# Altium PCB Payload_ESP.PcbDoc
Units mm, origin at the board's own origin, x right, y up, seen from the top; angles counter-clockwise.
Board outline 91.43 x 100 mm, 2 copper layers (Top Layer, Bottom Layer); 17 components, 43 nets, 123 pads, 0 vias.
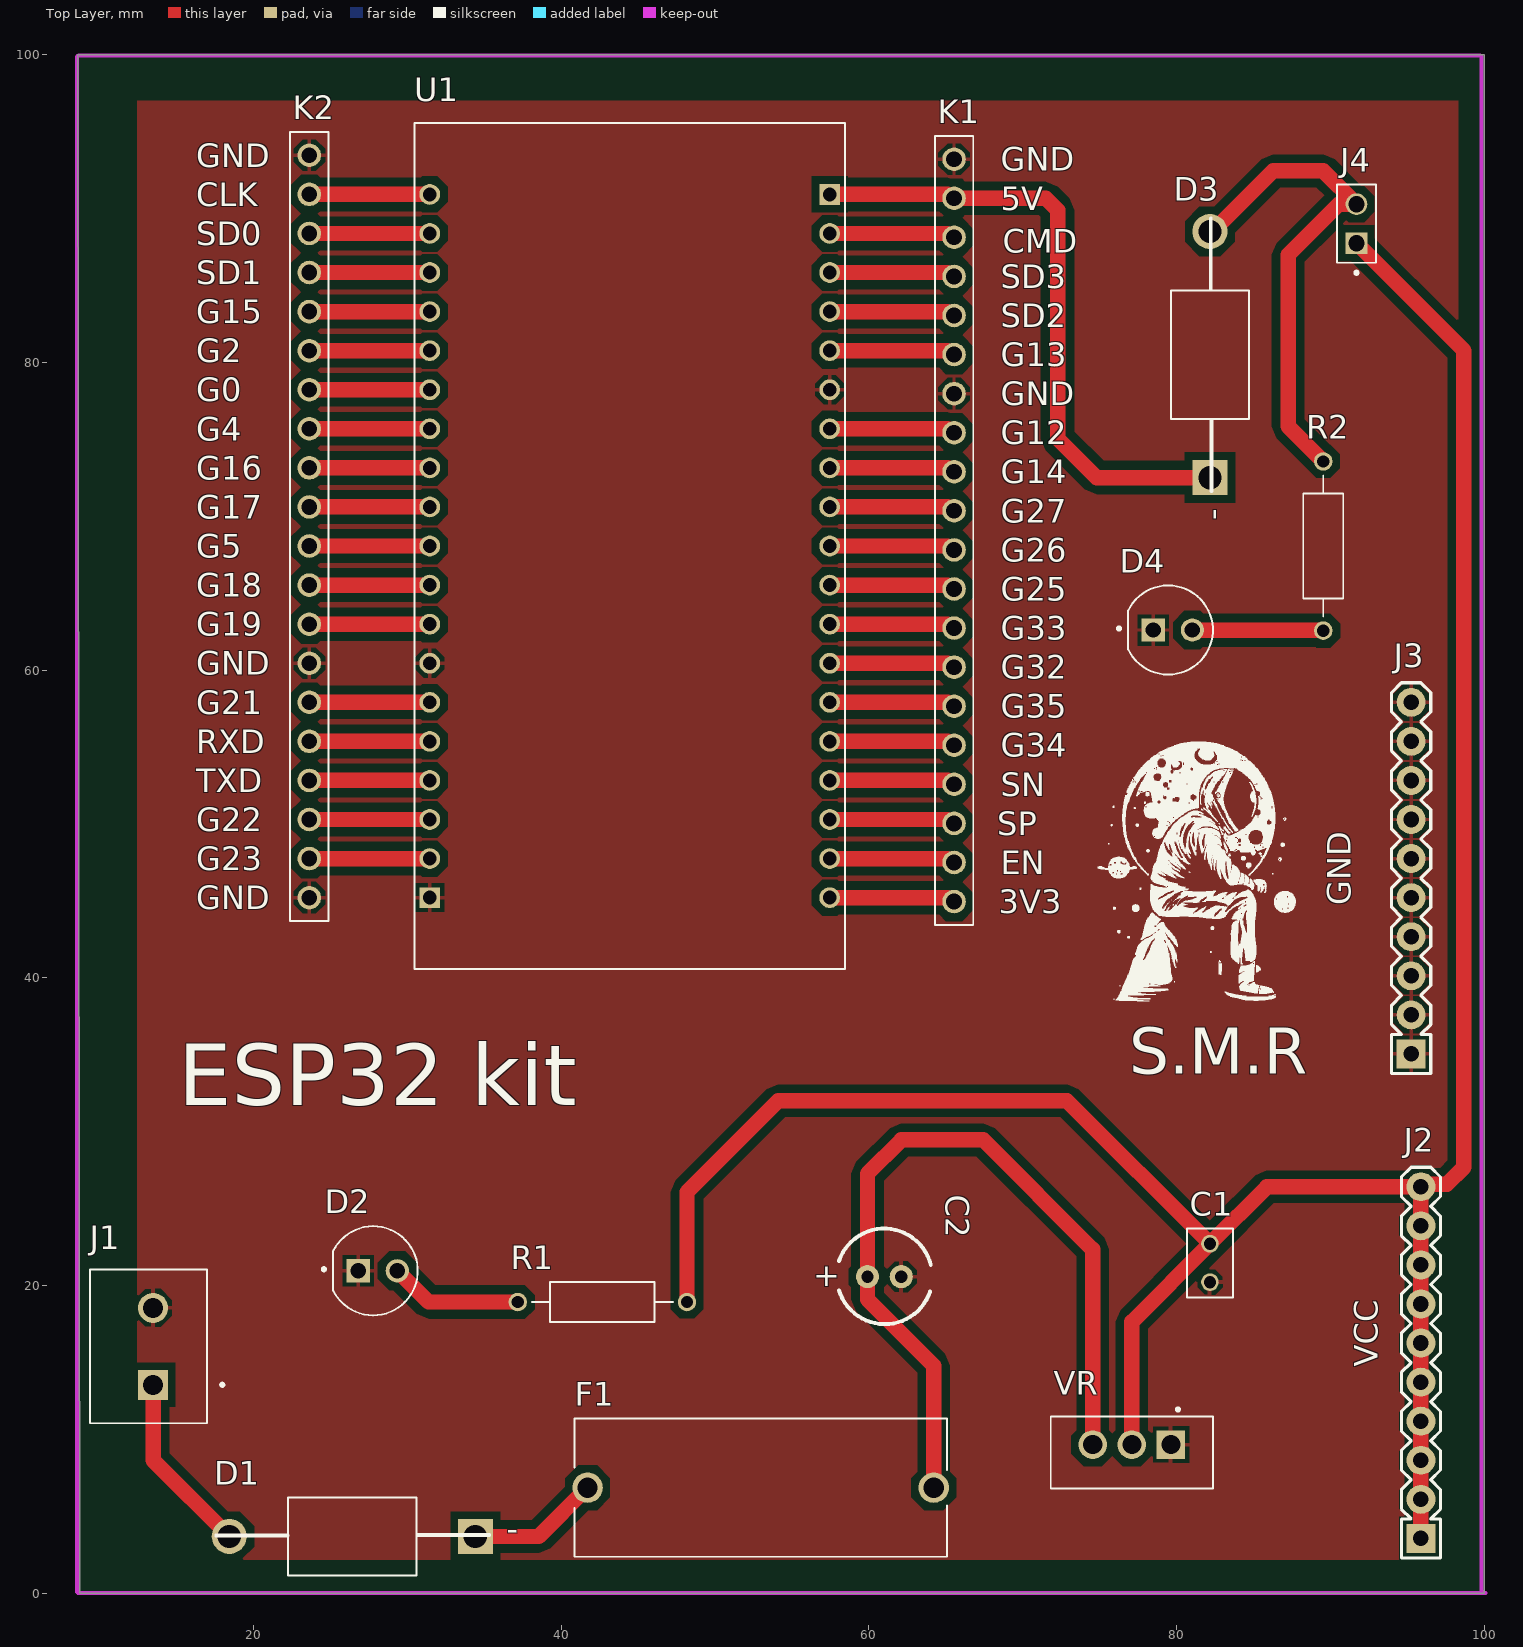
[diagram p0: Top Layer view]
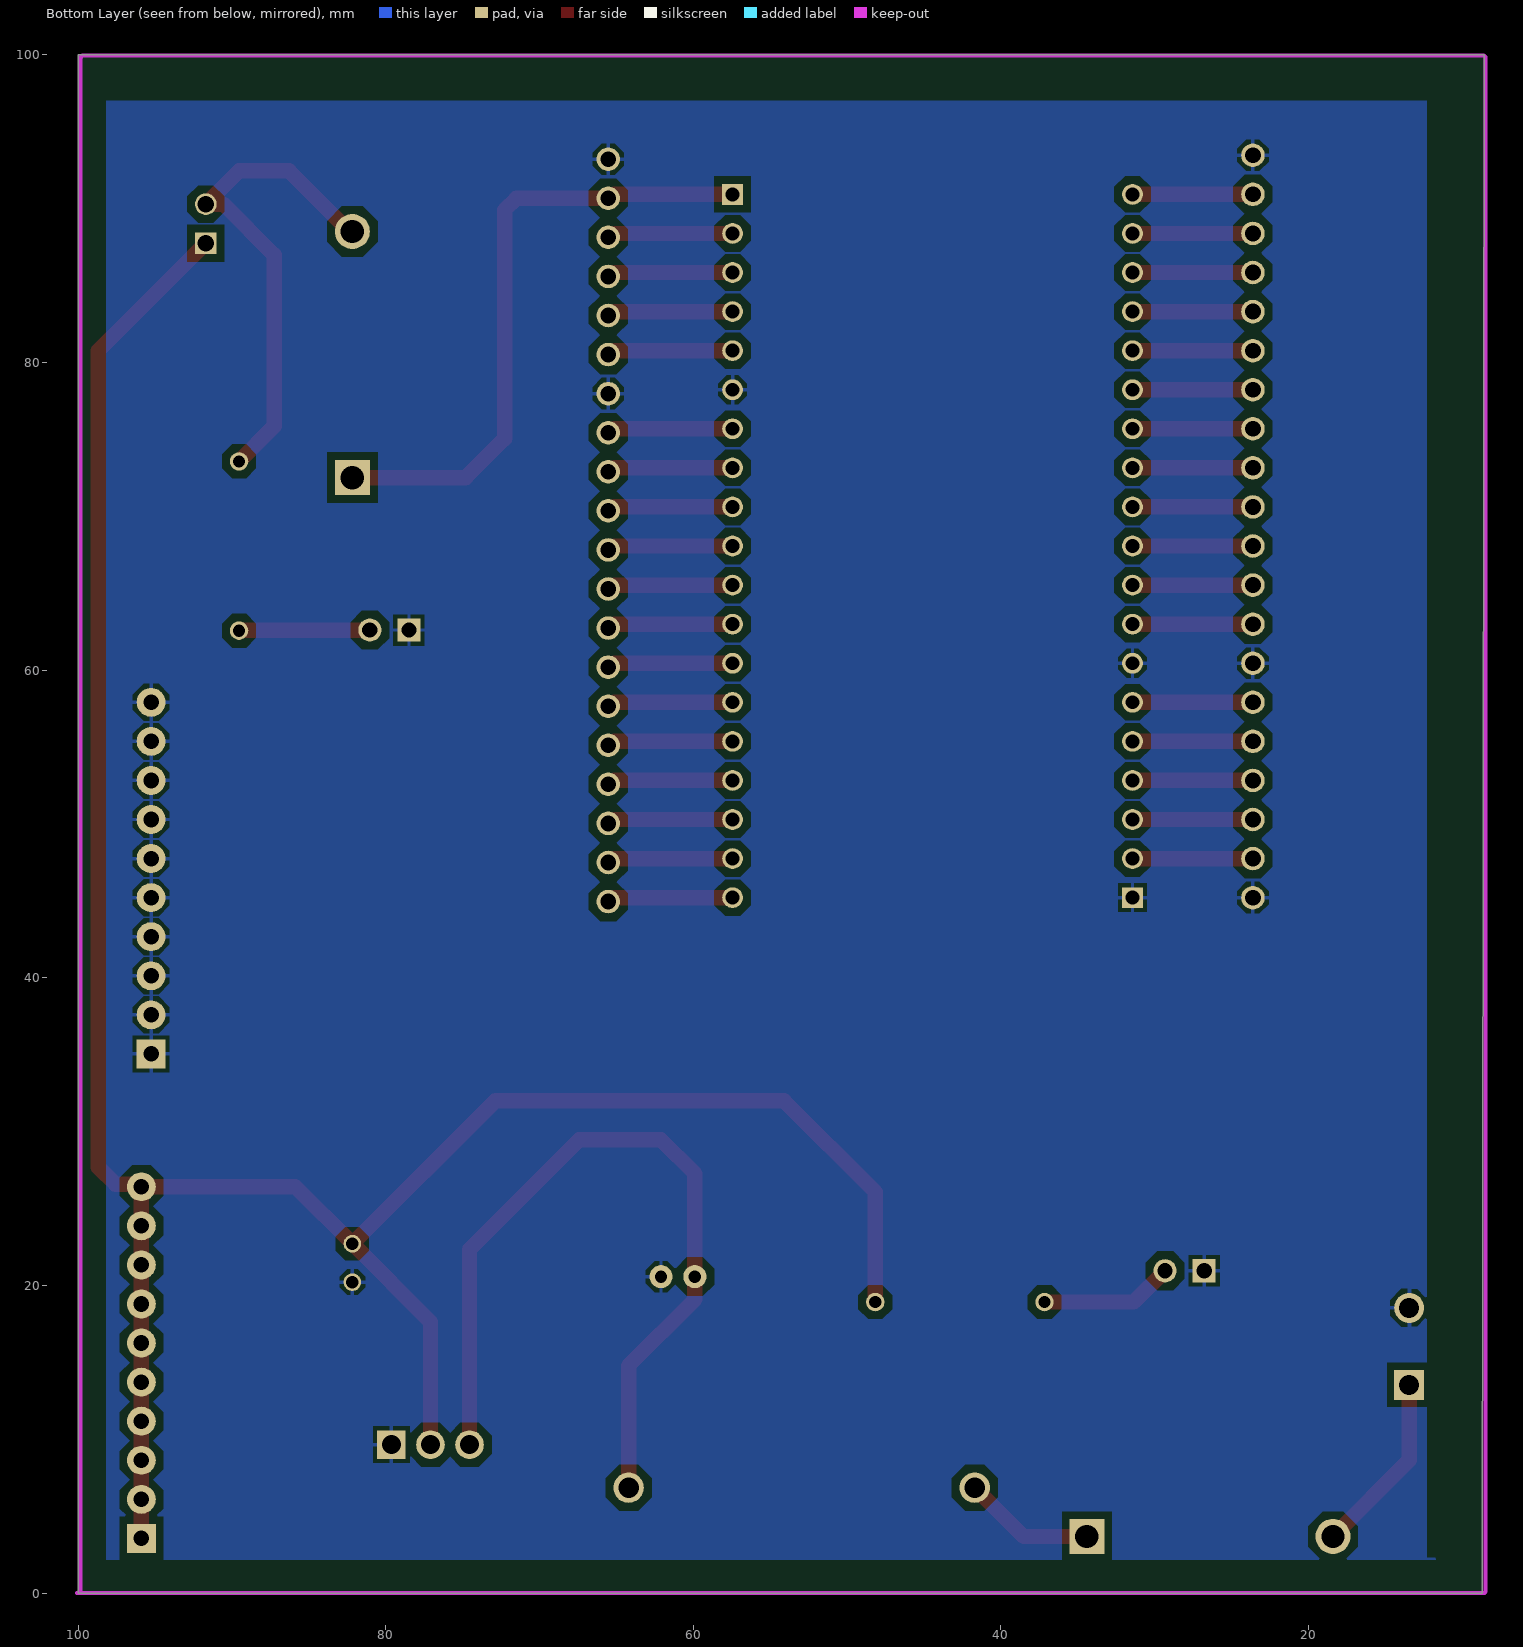
[diagram p1: Bottom Layer view, seen from below]
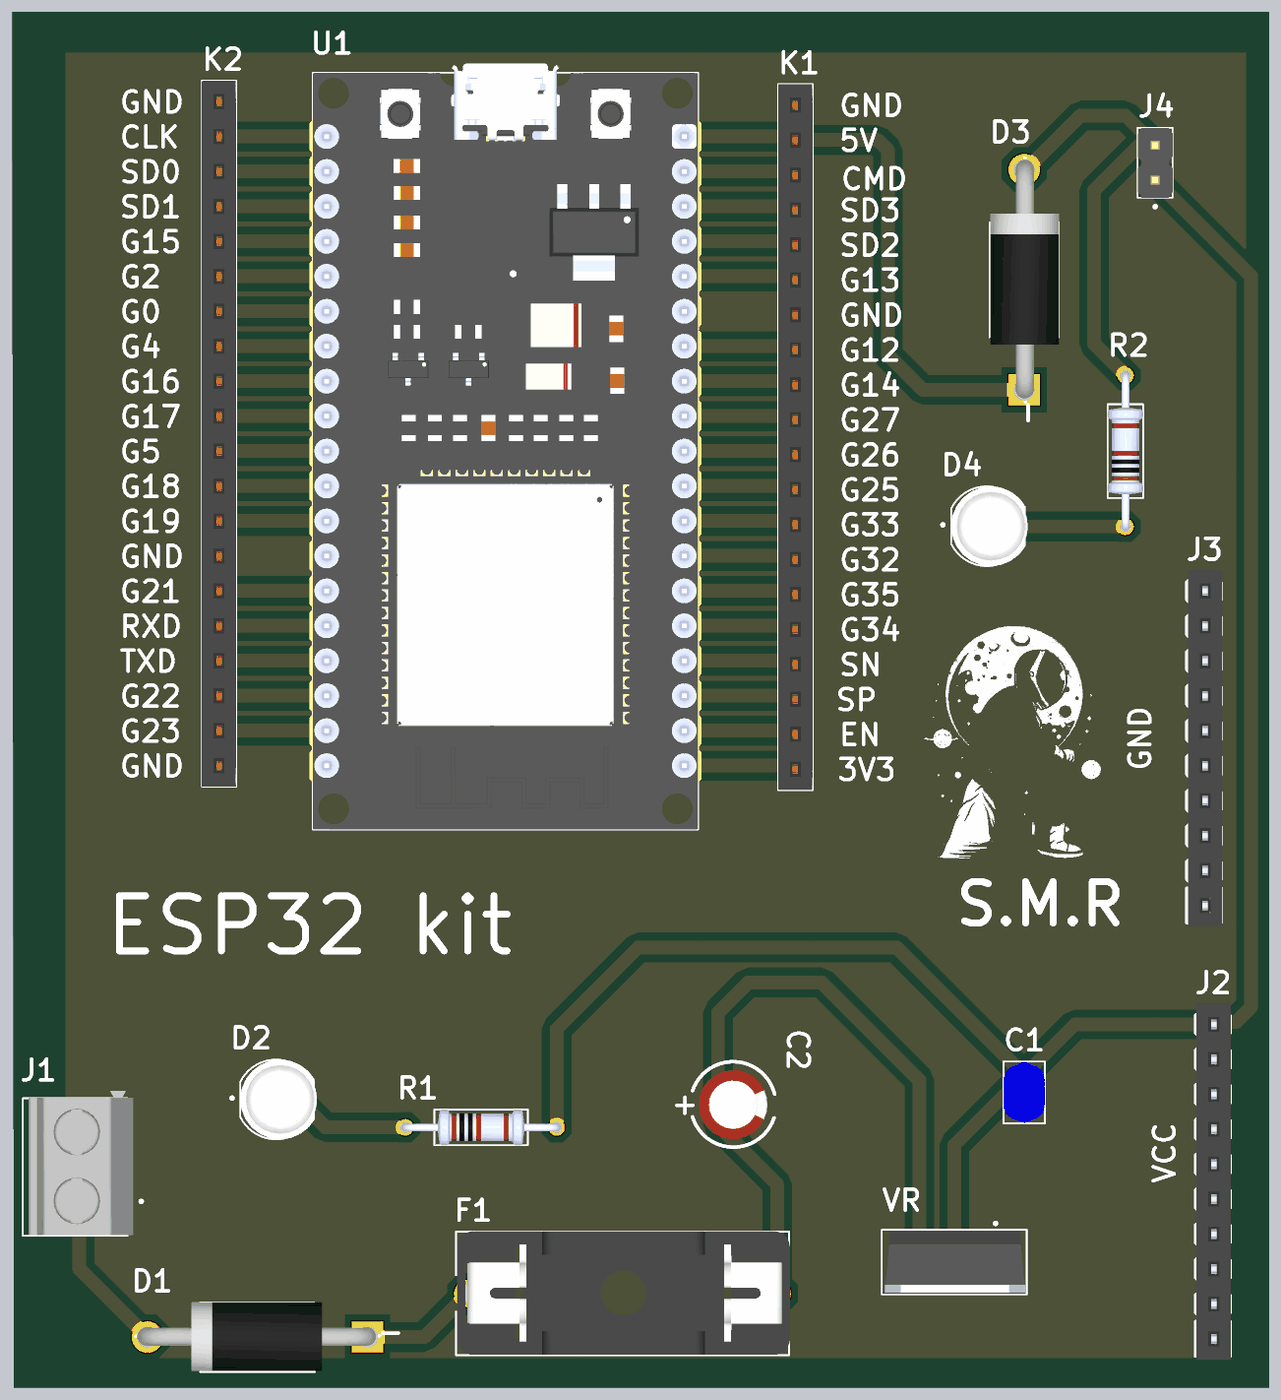
[diagram p2: 3D render of the assembled board from above, using the file's embedded part models]

## Layer stack, top to bottom
Top Solder: solder mask 0.0102, Solder Resist, Dk 3.5
Top Layer: signal copper 0.0356
Dielectric 1: dielectric 0.32, FR-4, Dk 4.8
Bottom Layer: signal copper 0.0356
Bottom Solder: solder mask 0.0102, Solder Resist, Dk 3.5

## Board outline
8.7,0 100,0 100,100 8.573,100

## Design rules (kind name [scope] priority, off if disabled: settings)
Clearance [All] p1: gap=0.5 ignorepadtopadclearanceinfootprint=TRUE
PolygonConnect [All] p1: connectstyle=Relief reliefconductorwidth=0.254 reliefentries=4 polygonreliefangle="90 Angle" airgapwidth=0.254
RoutingVias [All] p1: holewidth=0.711 width=1.27 viastyle="Through Hole" minholewidth=0.711 minwidth=1.27 maxholewidth=0.711 maxwidth=1.27
SolderMaskExpansion [All] p1: expansion=0.102 istentingtop=FALSE
Width [All] p1: maxlimit=1 minlimit=0.254 preferedwidth=0.5 minimp=50.000000 maximp=50.000000 favimp=50.000000
30 further rules are at their usual default settings.

## Components (designator, comment, footprint, x,y, rotation, side; value= is the part's Value field where it differs from the comment)
C1 "FA14X8R1H104KNU06" CAPRB250W50L450T300H550 82.169,21.463 r270 top
C2 "10uF" 860020672010 61.003,20.574 r0 top
D1 "1N5408" DIOAD2006W127L950D530 26.416,3.683 r180 top
D2 "151054RS03000" LED_151054RS03000 28.067,20.955 r0 top
D3 "1N5408" DIOAD2006W127L950D530 82.169,80.518 r90 top
D4 "151054RS03000" LED_151054RS03000 79.756,62.611 r0 top
F1 "4628" FUSE_4628 52.959,6.858 r0 top
J1 "TB002-500-02BE" CUI_TB002-500-02BE 13.462,13.542 r90 top
J2 "61301011821" 1X10-PIN 95.885,3.556 r90 top
J3 "61301011821" 1X10-PIN 95.25,35.052 r90 top
J4 "THS-02-R" VALCON_THS-02-R 91.694,89.027 r90 top
K1 "61302011821" 61302011821 65.532,69.088 r90 top
K2 "61302011821" 61302011821 23.622,69.342 r90 top
R1 "MFR-25FBF52-1K" RESAD1100W55L680D260 42.672,18.923 r0 top
R2 "MFR-25FBF52-1K" RESAD1100W55L680D260 89.535,68.072 r90 top
U1 "ESP32_NODEMCU" MODULE_ESP32_NODEMCU 44.45,68.072 r180 top
VR "LM317T" TO254P1054X470X1955-3 77.089,9.142 r180 top

## Footprints (in the part's own frame and the unit in brackets; to place one, negate y for a bottom-side part, rotate by r counter-clockwise, add the part's x,y. Pads: shape width x height; smd on the part's side, far side on the other; paste and mask are expansions set on the pad)
1X10-PIN [mil]
  rect 74x74 / inner round 74 / far side rect 74x74 hole 40: 1(0,0)
  round 74 hole 40: 2(100,0) 3(200,0) 4(300,0) 5(400,0) 6(500,0) 7(600,0) 8(700,0) 9(800,0) 10(900,0)
  silkscreen extent -50,-50 950,50, body extent -60,-52 960,46, height 344
61302011821 [mm]
  round 1.53 hole 1.02: 1(-24.13,0) 2(-21.59,0) 3(-19.05,0) 4(-16.51,0) 5(-13.97,0) 6(-11.43,0) 7(-8.89,0) 8(-6.35,0) 9(-3.81,0) 10(-1.27,0) 11(1.27,0) 12(3.81,0) 13(6.35,0) 14(8.89,0) 15(11.43,0) 16(13.97,0) 17(16.51,0) 18(19.05,0) 19(21.59,0) 20(24.13,0)
  silkscreen extent -25.65,-1.25 25.65,1.25, body extent -25.65,-1.25 25.65,1.25, height 8.75
860020672010 [mm]
  round 1.5 hole 0.8: 1(-1.1,0) 2(1.1,0)
  silkscreen extent -2.95,-3.09 3.02,3.12, body extent -2.5,-2.5 2.5,2.5, height 11
CAPRB250W50L450T300H550 [mm]
  round 1.15 hole 0.8: 1(-1.25,0) 2(1.25,0)
  silkscreen extent -2.25,-1.5 2.25,1.5, body extent -2.24,-1.5 2.24,1.5, height 5.75
CUI_TB002-500-02BE [mm]
  rect 1.95x1.95 / inner round 1.95 / far side rect 1.95x1.95 hole 1.3: 1(0,0)
  round 1.95 hole 1.3: 2(5,0)
  silkscreen extent -2.5,-4.6 7.5,4.1, body extent -2.46,-3.92 8.04,3.68, height 10
DIOAD2006W127L950D530 [mm]
  round 2.28 hole 1.52: A(8,0)
  rect 2.28x2.28 hole 1.52: C(-8,0)
  silkscreen extent -8.87,-2.52 8.85,2.52, body extent -8.61,-2.54 8.71,2.46, height 6
FUSE_4628 [mm]
  round 1.98 hole 1.32: 1(-11.25,0) 2(11.25,0)
  silkscreen extent -12.1,-4.49 12.1,4.49, body extent -12.03,-4.47 12.18,4.52, height 11.2
LED_151054RS03000 [mm]
  round 1.508 hole 1: A(1.27,0)
  rect 1.508x1.508 / inner round 1.508 / far side rect 1.508x1.508 hole 1: C(-1.27,0)
  silkscreen extent -3.6,-2.9 2.6,2.9, body extent -2.9,-2.9 2.51,2.9, height 10.1
MODULE_ESP32_NODEMCU [mm]
  rect 1.35x1.35 / inner round 1.35 / far side rect 1.35x1.35 hole 0.9: J4_1(13,22.86) J5_1(-13,-22.86)
  round 1.35 hole 0.9: J4_2(13,20.32) J4_3(13,17.78) J4_4(13,15.24) J4_5(13,12.7) J4_6(13,10.16) J4_7(13,7.62) J4_8(13,5.08) J4_9(13,2.54) J4_10(13,0) J4_11(13,-2.54) J4_12(13,-5.08) J4_13(13,-7.62) J4_14(13,-10.16) J4_15(13,-12.7) J4_16(13,-15.24) J4_17(13,-17.78) J4_18(13,-20.32) J4_19(13,-22.86) J5_2(-13,-20.32) J5_3(-13,-17.78) J5_4(-13,-15.24) J5_5(-13,-12.7) J5_6(-13,-10.16) J5_7(-13,-7.62) J5_8(-13,-5.08) J5_9(-13,-2.54) J5_10(-13,0) J5_11(-13,2.54) J5_12(-13,5.08) J5_13(-13,7.62) J5_14(-13,10.16) J5_15(-13,12.7) J5_16(-13,15.24) J5_17(-13,17.78) J5_18(-13,20.32) J5_19(-13,22.86)
  silkscreen extent -14,-27.5 14,27.5, body extent -14.25,-28.15 14.25,27.5, height 7.05
RESAD1100W55L680D260 [mm]
  round 1.2 hole 0.8: 1(-5.5,0) 2(5.5,0)
  silkscreen extent -4.58,-1.3 4.58,1.3, body extent -5.77,-1.3 5.77,1.3, height 2.6
TO254P1054X470X1955-3 [mm]
  rect 1.86x1.86 hole 1.24: 1(-2.54,-0.51)
  round 1.86 hole 1.24: 2(0,-0.51) 3(2.54,-0.51)
  silkscreen extent -5.27,-2.9 5.27,2.35, body extent -5.15,-2.27 5.05,2.22, height 19.68
VALCON_THS-02-R [mm]
  rect 1.41x1.41 hole 1.06: 01(-1.27,0)
  round 1.41 hole 1.06: 02(1.27,0)
  silkscreen extent -3.29,-1.27 2.54,1.27, body extent -2.54,-1.27 2.54,1.27, height 8.54

## Part data
C1: "0.1 ÂµF Â±10% 50V Ceramic Capacitor X8R Radial", Package="Radial TDK", Availability="In Stock", Check_prices=https://www.snapeda.com/parts/FA14X8R1H104KNU06/TDK/view-part/?ref=eda, MF=TDK, MP=FA14X8R1H104KNU06, Price=None, Purchase-URL=https://pricing.snapeda.com/search/part/FA14X8R1H104KNU06/?ref=eda, SnapEDA_Link=https://www.snapeda.com/parts/FA14X8R1H104KNU06/TDK/view-part/?ref=snap
C2: library part 860020672010, "THT capacitor 10 µF 50 V .              Aluminum Electrolytic Capacitors Radial, Can 2000 Hrs @ 105°C", P/N=860020672010
D1 D3: "Diode Standard 1000V 3A Through Hole DO-201AD", Package="AXIAL LEAD-2 ON Semiconductor", Availability="In Stock", Check_prices=https://www.snapeda.com/parts/1N5408/Onsemi/view-part/?ref=eda, MF=ON, MP=1N5408, Price=None, SnapEDA_Link=https://www.snapeda.com/parts/1N5408/Onsemi/view-part/?ref=snap
D2 D4: "Red 623nm LED Indication - Discrete 1.9V Radial", Package="Radial Wurth Elektronik", Availability="In Stock", Check_prices=https://www.snapeda.com/parts/151054RS03000/Wurth+Elektronik/view-part/?ref=eda, MF="Wurth Elektronik", MP=151054RS03000, Price=None, Purchase-URL=https://pricing.snapeda.com/search/part/151054RS03000/?ref=eda, SnapEDA_Link=https://www.snapeda.com/parts/151054RS03000/Wurth+Elektronik/view-part/?ref=snap
F1: "5mm Slim Line Fuse holder", Package=None, Availability="In Stock", Check_prices=https://www.snapeda.com/parts/4628/Keystone/view-part/?ref=eda, MF=Keystone, MP=4628, Price=None, Purchase-URL=https://pricing.snapeda.com/search/part/4628/?ref=eda, SnapEDA_Link=https://www.snapeda.com/parts/4628/Keystone/view-part/?ref=snap
J1: "2~24 Poles, Screw Type, Horizontal, 5.0 Pitch, 22~12 (AWG), Terminal Block Connector", Package=None, Availability="In Stock", Check_prices=https://www.snapeda.com/parts/TB002-500-02BE/CUI+Devices/view-part/?ref=eda, CUI_purchase_URL=https://www.cuidevices.com/product/interconnect/connectors/terminal-blocks/tb002-500-series?utm_source=snapeda.com&utm_medium=referral&utm_campaign=snapedaBOM, MF="CUI Devices", MP=TB002-500-02BE, Price=None, Purchase-URL=https://pricing.snapeda.com/search/part/TB002-500-02BE/?ref=eda, SnapEDA_Link=https://www.snapeda.com/parts/TB002-500-02BE/CUI+Devices/view-part/?ref=snap
J2 J3: "10 Position Header Connector 0.100 (2.54mm) Through Hole Gold", Package=None, Check_prices=https://www.snapeda.com/parts/61301011821/Wurth+Electronics+Inc./view-part/?ref=eda, MF="Wurth Electronics", MP=61301011821, SnapEDA_Link=https://www.snapeda.com/parts/61301011821/Wurth+Electronics+Inc./view-part/?ref=snap
J4: Package=None, Availability=Unavailable, MP=THS-02-R, Price=None
K1 K2: "20 Position Receptacle Connector 0.100 (2.54mm) Through Hole Gold", Package=None, Check_prices=https://www.snapeda.com/parts/61302011821/Wurth+Elektronik/view-part/?ref=eda, MF="WÃ¼rth Elektronik", MP=61302011821, SnapEDA_Link=https://www.snapeda.com/parts/61302011821/Wurth+Elektronik/view-part/?ref=snap
R1 R2: "1.07 kOhms Â±1% 0.25W, 1/4W Through Hole Resistor Axial - Metal Film", Package="Axial Yageo", Availability="In Stock", Check_prices=https://www.snapeda.com/parts/MFR-25FBF52-1K/Yageo/view-part/?ref=eda, MF=Yageo, MP=MFR-25FBF52-1K, Price=None, Purchase-URL=https://pricing.snapeda.com/search/part/MFR-25FBF52-1K/?ref=eda, SnapEDA_Link=https://www.snapeda.com/parts/MFR-25FBF52-1K/Yageo/view-part/?ref=snap
U1: "NodeMCU is an open source loT platform. ESP32 is a series of low cost, low powersystem-on-chip (SoC) microcontrollers with integrated Wi-Fi & dual-mode Bluetooth.", Package=Package, Check_prices=https://www.snapeda.com/parts/ESP32%20NODEMCU/Espressif+Systems/view-part/?ref=eda, MF="Espressif Systems", MP="ESP32 NODEMCU", SnapEDA_Link=https://www.snapeda.com/parts/ESP32%20NODEMCU/Espressif+Systems/view-part/?ref=snap
VR: "Linear Voltage Regulator IC 1 Output 1.5A TO-220-3", Package="TO-220 Texas Instruments", Availability=Unavailable, MF="Texas Instruments", MP=LM317T, Price=None, SnapEDA_Link=https://www.snapeda.com/parts/LM317T/Texas%20Instruments/view-part/6933/?ref=snap

## Nets (pads, with @x,y where several pads share a name; then routed paths per layer and width w, separated by ;. In a path a pad name is that pad's centre, name@x,y a point inside that pad or via, vN(x,y) a via of type N, cw(c..) or ccw(c..) an arc to the next point about the centre after c; other vN are vias at no path point)
3v3: K1.1 U1.J5_19 | length 8.2
  Top Layer w1: U1.J5_19 65.135,45.212 65.389,44.958 K1.1
5v: D3.C K1.19 U1.J5_1 | length 41.1
  Top Layer w1: U1.J5_1 65.135,90.932 65.389,90.678 K1.19 71.501,90.678 72.263,89.916 72.263,75.057 74.802,72.518 D3.C
+5: C1.1 J2.1 J2.2 J2.3 J2.4 J2.5 J2.6 J2.7 J2.8 J2.9 J2.10 J4.01 R1.2 VR.2 | length 167
  Top Layer w1: R1.2 48.172,26.074 54.102,32.004 72.878,32.004 C1.1 ; VR.2 77.089,17.633 C1.1 ; J4.01 98.679,80.772 98.679,27.686 97.577,26.584 96.053,26.584 J2.10 ; J2.1 J2.2 J2.3 J2.4 J2.5 J2.6 J2.7 J2.8 J2.9 J2.10 ; C1.1 85.872,26.416 J2.10
CLK: K2.19 U1.J4_19 | length 7.8
  Top Layer w1: K2.19 U1.J4_19
CMD: K1.18 U1.J5_2 | length 8.2
  Top Layer w1: U1.J5_2 65.135,88.392 65.389,88.138 K1.18
EN: K1.2 U1.J5_18 | length 8.2
  Top Layer w1: U1.J5_18 65.135,47.752 65.389,47.498 K1.2
G0: K2.14 U1.J4_14 | length 7.8
  Top Layer w1: K2.14 U1.J4_14
G2: K2.15 U1.J4_15 | length 7.8
  Top Layer w1: K2.15 U1.J4_15
G4: K2.13 U1.J4_13 | length 7.8
  Top Layer w1: K2.13 U1.J4_13
G5: K2.10 U1.J4_10 | length 7.8
  Top Layer w1: K2.10 U1.J4_10
G12: K1.13 U1.J5_7 | length 8.2
  Top Layer w1: U1.J5_7 65.135,75.692 65.389,75.438 K1.13
G13: K1.15 U1.J5_5 | length 8.2
  Top Layer w1: U1.J5_5 65.135,80.772 65.389,80.518 K1.15
G14: K1.12 U1.J5_8 | length 8.2
  Top Layer w1: U1.J5_8 65.135,73.152 65.389,72.898 K1.12
G15: K2.16 U1.J4_16 | length 7.8
  Top Layer w1: K2.16 U1.J4_16
G16: K2.12 U1.J4_12 | length 7.8
  Top Layer w1: K2.12 U1.J4_12
G17: K2.11 U1.J4_11 | length 7.8
  Top Layer w1: K2.11 U1.J4_11
G18: K2.9 U1.J4_9 | length 7.8
  Top Layer w1: K2.9 U1.J4_9
G19: K2.8 U1.J4_8 | length 7.8
  Top Layer w1: K2.8 U1.J4_8
G21: K2.6 U1.J4_6 | length 7.8
  Top Layer w1: K2.6 U1.J4_6
G22: K2.3 U1.J4_3 | length 7.8
  Top Layer w1: K2.3 U1.J4_3
G23: K2.2 U1.J4_2 | length 7.8
  Top Layer w1: K2.2 U1.J4_2
G25: K1.9 U1.J5_11 | length 8.2
  Top Layer w1: U1.J5_11 65.135,65.532 65.389,65.278 K1.9
G26: K1.10 U1.J5_10 | length 8.2
  Top Layer w1: U1.J5_10 65.135,68.072 65.389,67.818 K1.10
G27: K1.11 U1.J5_9 | length 8.2
  Top Layer w1: U1.J5_9 65.135,70.612 65.389,70.358 K1.11
G32: K1.7 U1.J5_13 | length 8.2
  Top Layer w1: U1.J5_13 65.135,60.452 65.389,60.198 K1.7
G33: K1.8 U1.J5_12 | length 8.2
  Top Layer w1: U1.J5_12 65.135,62.992 65.389,62.738 K1.8
G34: K1.5 U1.J5_15 | length 8.2
  Top Layer w1: U1.J5_15 65.135,55.372 65.389,55.118 K1.5
G35: K1.6 U1.J5_14 | length 8.2
  Top Layer w1: U1.J5_14 65.135,57.912 65.389,57.658 K1.6
GND: C1.2 C2.2 D2.C D4.C J1.2 J3.1 J3.2 J3.3 J3.4 J3.5 J3.6 J3.7 J3.8 J3.9 J3.10 K1.14 K1.20 K2.1 K2.7 K2.20 U1.J4_1 U1.J4_7 U1.J5_6 VR.1
NetC2_1: C2.1 F1.2 VR.3 | length 53.4
  Top Layer w1: F1.2 64.209,14.785 59.903,19.091 59.903,27.264 62.103,29.464 67.437,29.464 74.549,22.352 VR.3
NetD1_A: D1.A J1.1 | length 11.9
  Top Layer w1: J1.1 13.462,8.637 D1.A
NetD1_C: D1.C F1.1 | length 8.6
  Top Layer w1: D1.C 38.534,3.683 F1.1
NetD2_A: D2.A R1.1 | length 8.7
  Top Layer w1: D2.A 31.369,18.923 R1.1
NetD3_A: D3.A J4.02 R2.2 | length 32.2
  Top Layer w1: D3.A 82.345,88.518 86.283,92.456 89.535,92.456 J4.02 90.551,90.297 87.249,86.995 87.249,75.858 R2.2
NetD4_A: D4.A R2.1 | length 8.5
  Top Layer w1: D4.A 81.045,62.592 89.516,62.592 R2.1
RXD: K2.5 U1.J4_5 | length 7.8
  Top Layer w1: K2.5 U1.J4_5
SD0: K2.18 U1.J4_18 | length 7.8
  Top Layer w1: K2.18 U1.J4_18
SD1: K2.17 U1.J4_17 | length 7.8
  Top Layer w1: K2.17 U1.J4_17
SD2: K1.16 U1.J5_4 | length 8.2
  Top Layer w1: U1.J5_4 65.135,83.312 65.389,83.058 K1.16
SD3: K1.17 U1.J5_3 | length 8.2
  Top Layer w1: U1.J5_3 65.135,85.852 65.389,85.598 K1.17
SN: K1.4 U1.J5_16 | length 8.2
  Top Layer w1: U1.J5_16 65.135,52.832 65.389,52.578 K1.4
SP: K1.3 U1.J5_17 | length 8.2
  Top Layer w1: U1.J5_17 65.135,50.292 65.389,50.038 K1.3
TXD: K2.4 U1.J4_4 | length 7.8
  Top Layer w1: K2.4 U1.J4_4

## Polygon pours and split planes (outlines as drawn)
GND on Bottom Layer "GND_L02_P000" (solid, remove dead copper, pour order 0): 12.319,2.286 12.319,97.028 98.171,97.028 98.171,2.159 11.684,2.159 11.557,2.286
GND on Top Layer "GND_L01_P001" (solid, remove dead copper, pour order 1): 12.446,2.286 12.446,97.028 98.298,97.028 98.298,2.159 11.811,2.159 11.684,2.286

## Keep-outs
Keep-Out Layer:
  lines w0.254: 8.509,0.127 ccw(c8.636,0.127) 8.636,0 100.076,0 cw(c100.076,0.254) 99.822,0.254 99.822,99.822 ccw(c99.695,99.822) 99.695,99.949 8.636,99.949 ccw(c8.636,99.822) 8.509,99.822 8.509,0.127

## Silkscreen, mask and mechanical layers (free items; w line width, h text height)
Top Overlay:
  drawing of 57 lines, arcs and shapes, not listed
  text "GND" at 16.256,92.71 h1.52
  text "GND" at 68.58,92.456 h1.52
  text "CLK" at 16.256,90.17 h1.52
  text "5V" at 68.58,89.916 h1.52
  text "SD0" at 16.256,87.63 h1.52
  text "CMD" at 68.707,87.122 h1.52
  text "SD1" at 16.256,85.09 h1.52
  text "SD3" at 68.58,84.836 h1.52
  text "G15" at 16.256,82.55 h1.52
  text "SD2" at 68.58,82.296 h1.52
  text "G2" at 16.256,80.01 h1.52
  text "G13" at 68.58,79.756 h1.52
  text "G0" at 16.256,77.47 h1.52
  text "GND" at 68.58,77.216 h1.52
  text "G4" at 16.256,74.93 h1.52
  text "G12" at 68.58,74.676 h1.52
  text "G16" at 16.256,72.39 h1.52
  text "G14" at 68.58,72.136 h1.52
  text "G17" at 16.256,69.85 h1.52
  text "G27" at 68.58,69.596 h1.52
  text "G5" at 16.256,67.31 h1.52
  text "G26" at 68.58,67.056 h1.52
  text "G18" at 16.256,64.77 h1.52
  text "G25" at 68.58,64.516 h1.52
  text "G19" at 16.256,62.23 h1.52
  text "G33" at 68.58,61.976 h1.52
  text "GND" at 16.256,59.69 h1.52
  text "G32" at 68.58,59.436 h1.52
  text "G21" at 16.256,57.15 h1.52
  text "G35" at 68.58,56.896 h1.52
  text "RXD" at 16.256,54.61 h1.52
  text "G34" at 68.58,54.356 h1.52
  text "TXD" at 16.256,52.07 h1.52
  text "SN" at 68.58,51.816 h1.52
  text "G22" at 16.256,49.53 h1.52
  text "SP" at 68.326,49.276 h1.52
  text "G23" at 16.256,46.99 h1.52
  text "EN" at 68.58,46.736 h1.52
  text "GND" at 91.313,44.704 h1.52 r90
  text "GND" at 16.256,44.45 h1.52
  text "3V3" at 68.453,44.196 h1.52
  text "S.M.R" at 76.938,33.758 h3
  text "ESP32 kit" at 15.089,31.726 h4
  text "VCC" at 93.091,14.732 h1.52 r90

## Text inside footprints (layer, text, board x,y; h text height)
C2: Top Overlay "+" at 56.38,19.939 h1.52
D1: Top Overlay "-" at 37.187,4.566 h1.52 r180
D3: Top Overlay "-" at 83.052,69.747 h1.52 r90